# Altium PCB BatteryMonitorPCB.PcbDoc
Units mil, origin at the board's own origin, x right, y up, seen from the top; angles counter-clockwise.
Board outline 6000 x 4000 mil, 2 copper layers (Top Layer, Bottom Layer); 9 components, 7 nets, 28 pads, 0 vias.
Unrouted connection lines stored in the file: 19.
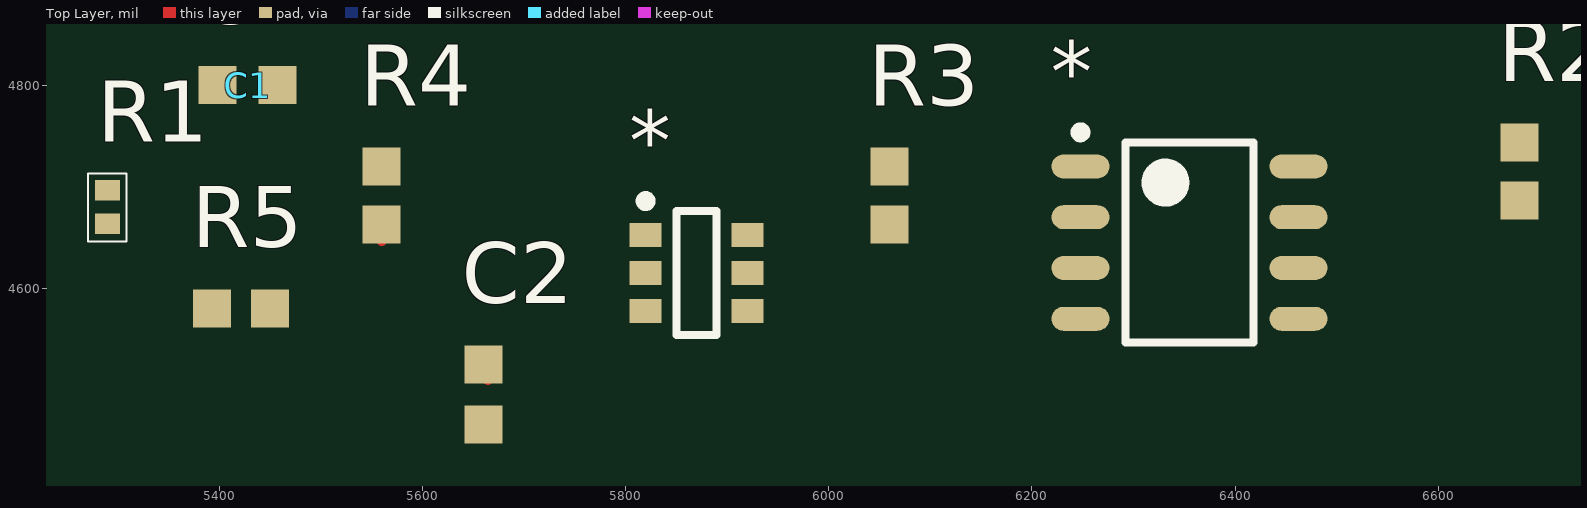
[diagram p0: Top Layer view]
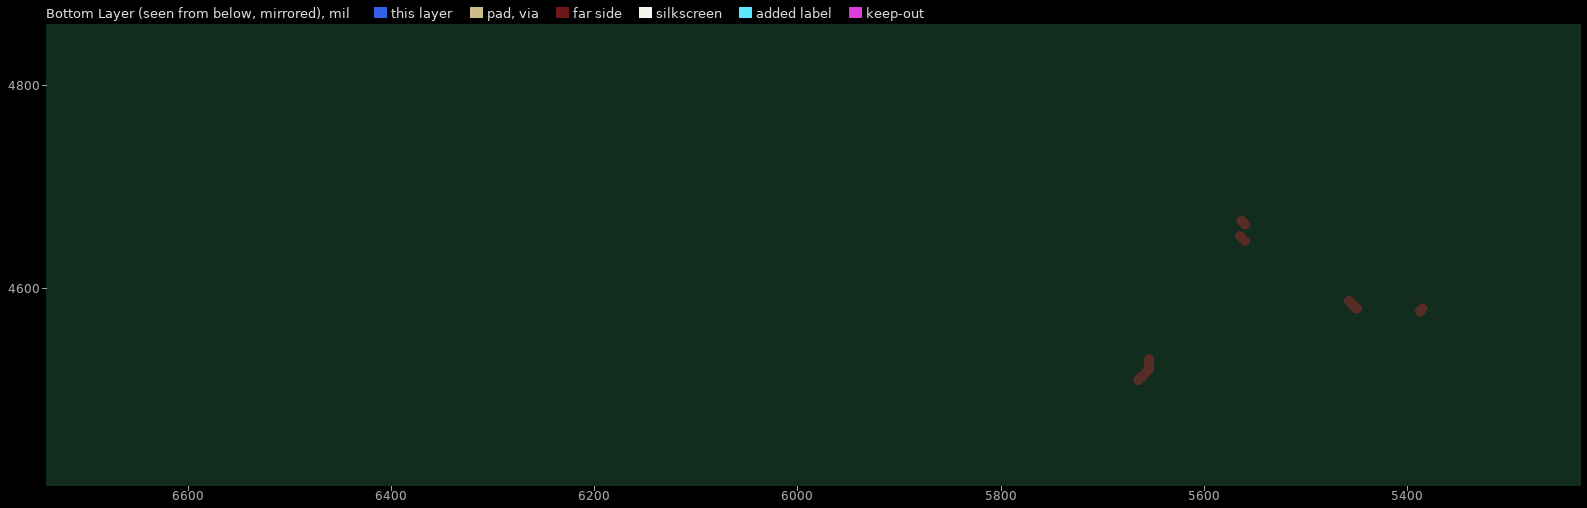
[diagram p1: Bottom Layer view, seen from below]

## Layer stack, top to bottom
Top Solder: solder mask 0.4, Solder Resist, Dk 3.5
Top Layer: signal copper 1.4
Dielectric 1: dielectric 12.6, FR-4, Dk 4.8
Bottom Layer: signal copper 1.4
Bottom Solder: solder mask 0.4, Solder Resist, Dk 3.5

## Board outline
1000,1000 7000,1000 7000,5000 1000,5000

## Design rules (kind name [scope] priority, off if disabled: settings)
Clearance [All] p1: gap=10 ignorepadtopadclearanceinfootprint=FALSE except(0: Arc-Hole Track-Hole SMDPad-Hole THPad-Hole Via-Hole Fill-Hole Poly-Hole Region-Hole Text-Hole)
PolygonConnect [All] p1: connectstyle=Relief reliefconductorwidth=10 reliefentries=4 polygonreliefangle="90 Angle" airgapwidth=10
RoutingVias [All] p1: holewidth=28 width=50 viastyle="Through Hole" minholewidth=28 minwidth=50 maxholewidth=28 maxwidth=50
SolderMaskExpansion [All] p1: expansion=4
Width [All] p1: maxlimit=10 minlimit=10 preferedwidth=10
30 further rules are at their usual default settings.

## Classes and differential pairs
component class BatteryMonitorSchematic: * C1 C2 R1 R2 R3 R4 R5

## Components (designator, comment, footprint, x,y, rotation, side; value= is the part's Value field where it differs from the comment)
* "ISO1540DR" ISO154x 6355,4645 r0 top
* "ADS1000A0IDBVT" ADS1110 5870,4615 r0 top
C1 "0.1uF" CAPC1608X97X38NL12T08 5428.07,4800 r0 top
C2 "0.1uF" CAPC1608X97X38NL12T08 5660,4495.47 r90 top
R1 "10K" 0402 5290,4680 r270 top
R2 "1K" RESC1609X55X30NL10T20 6680,4715 r90 top
R3 "1K" RESC1609X55X30NL10T20 6060,4691.46 r90 top
R4 "1K" RESC1609X55X30NL10T20 5560,4691.46 r90 top
R5 "1K" RESC1609X55X30NL10T20 5421.46,4580 r0 top

## Footprints (in the part's own frame and the unit in brackets; to place one, negate y for a bottom-side part, rotate by r counter-clockwise, add the part's x,y. Pads: shape width x height; smd on the part's side, far side on the other; paste and mask are expansions set on the pad)
0402 [mm]
  rect 0.508x0.63 smd: 1(-0.42,0) 2(0.42,0)
  silkscreen extent -0.84,-0.48 0.86,0.48, body extent -0.5,-0.28 0.5,0.28, height 0.51
ADS1110 [mm] "SOT23, 6-Leads, Body 2.90x2.45mm, Pitch 0.95mm, IPC Medium Density"
  rect 0.8x0.6 smd: 1(-1.275,0.95) 2(-1.275,0) 3(-1.275,-0.95) 4(1.275,-0.95) 5(1.275,0) 6(1.275,0.95)
  silkscreen extent -1.4,-1.55 0.5,1.92, body extent -1.2,-1.53 1.2,1.53, height 1.45
CAPC1608X97X38NL12T08 [mm]
  rect 0.95x0.95 smd: 1(-0.75,0) 2(0.75,0)
  body extent -0.86,-0.46 0.86,0.46, height 0.97
ISO154x [mm] "SOIC, 8-Leads, Body 4.91x3.90mm, Pitch 1.27mm, IPC Medium Density"
  oval 1.45x0.6 smd: 1(-2.725,1.905) 2(-2.725,0.635) 3(-2.725,-0.635) 4(-2.725,-1.905) 5(2.725,-1.905) 6(2.725,-0.635) 7(2.725,0.635) 8(2.725,1.905)
  silkscreen extent -2.85,-2.5 1.6,2.88, body extent -2.61,-2.5 2.61,2.5, height 1.9
RESC1609X55X30NL10T20 [mm]
  rect 0.95x0.95 smd: 1(-0.725,0) 2(0.725,0)
  body extent -0.85,-0.48 0.85,0.48, height 0.55

## Part data
*: "TEXAS INSTRUMENTS - ISO1540DR - DIGITAL ISOLATOR, 2-CH, 1MBPS, SOIC-8", Case/Package=SOIC, Isolated Power=No, Manufacturer="Texas Instruments", Max Operating Temperature=125°C, Max Supply Voltage=5.5V, Min Operating Temperature=-40°C, Min Supply Voltage=3V, Nominal Supply Current=3.6mA, Package Quantity=1, Supplier Part Number 1=296-34871-1-ND, Working Voltage=566V, Category="Interface ICs", Channel Type=Bidirectional, ComponentLink1Description=https://datasheet.ciiva.com/6579/iso1540-6579725.pdf?src-supplier=Digi-Key, ComponentLink1URL=https://datasheet.ciiva.com/6579/iso1540-6579725.pdf?src-supplier=Digi-Key, ComponentLink2Description=https://datasheet.ciiva.com/6579/iso1540-6579723.pdf?src-supplier=Digi-Key, ComponentLink2URL=https://datasheet.ciiva.com/6579/iso1540-6579723.pdf?src-supplier=Digi-Key, ComponentLink3Description=https://datasheet.ciiva.com/6579/iso1540-6579724.pdf?src-supplier=Digi-Key, ComponentLink3URL=https://datasheet.ciiva.com/6579/iso1540-6579724.pdf?src-supplier=Digi-Key, ComponentLink4Description=https://datasheet.ciiva.com/14196/iso1540-14196749.pdf?src-supplier=Avnet, ComponentLink4URL=https://datasheet.ciiva.com/14196/iso1540-14196749.pdf?src-supplier=Avnet, Data Rate=1Mbps, Lead Free="Lead Free", Manufacturer Part Number=ISO1540DR, Mount="Surface Mount", Number of Channels=2, Number of Pins=8, Packaging="Tape and Reel", Pricing 1="1=4.78000, 10=4.28900, 25=4.05440, 100=3.33370, 250=2.99132, 500=2.88320, 1000=2.39666 (USD)", Propagation Delay=70ns, Pulse Width Distortion (PWD)=21ns, REACH SVHC="No SVHC", RoHS=Yes, RoHS Compliant=Yes, Series=-, Stock 1=3199, Supplier 1=Digi-Key, Supply Current=3.6mA
*: "IC ADC 12BIT I2C INTRFC SOT23-6", Case/Package=SOT-23, Manufacturer="Texas Instruments", Max Operating Temperature=125°C, Max Power Dissipation=750uW, Max Supply Voltage=5.5V, Min Operating Temperature=-40°C, Min Supply Voltage=2.7V, Nominal Supply Current=90uA, Operating Supply Voltage=5V, Package Quantity=250, ADS1000A0IDBVT=296-20737-1-ND, Category="Analog to Digital Converters (ADCs)", ComponentLink1Description=https://datasheet.ciiva.com/34304/2045835-34304018.pdf?src-supplier=Jameco, ComponentLink1URL=https://datasheet.ciiva.com/34304/2045835-34304018.pdf?src-supplier=Jameco, ComponentLink2Description=https://datasheet.ciiva.com/3038/sbas357a-3038709.pdf?src-supplier=Avnet, ComponentLink2URL=https://datasheet.ciiva.com/3038/sbas357a-3038709.pdf?src-supplier=Avnet, ComponentLink3Description=https://datasheet.ciiva.com/1704/1831216-1704227.pdf?src-supplier=Element14, ComponentLink3URL=https://datasheet.ciiva.com/1704/1831216-1704227.pdf?src-supplier=Element14, ComponentLink4Description=https://datasheet.ciiva.com/3037/sbas357a-3037894.pdf?src-supplier=Avnet, ComponentLink4URL=https://datasheet.ciiva.com/3037/sbas357a-3037894.pdf?src-supplier=Avnet, ComponentLink5Description=https://datasheet.ciiva.com/7989/ads1000-7989305.pdf?src-supplier=Element14, ComponentLink5URL=https://datasheet.ciiva.com/7989/ads1000-7989305.pdf?src-supplier=Element14, ComponentLink6Description=https://datasheet.ciiva.com/15148/getdatasheetpartid-184680-15148061.pdf?src-supplier=Verical, ComponentLink6URL=https://datasheet.ciiva.com/15148/getdatasheetpartid-184680-15148061.pdf?src-supplier=Verical, ComponentLink7Description=https://datasheet.ciiva.com/1275/ads1000-1275150.pdf?src-supplier=Digi-Key, ComponentLink7URL=https://datasheet.ciiva.com/1275/ads1000-1275150.pdf?src-supplier=Digi-Key, ComponentLink8Description=https://datasheet.ciiva.com/1275/ads1000-1275151.pdf?src-supplier=Digi-Key, ComponentLink8URL=https://datasheet.ciiva.com/1275/ads1000-1275151.pdf?src-supplier=Digi-Key, Contact Plating=Gold, Conversion Rate=128S/s, Differential Nonlinearity=1LSB, Height=1.15mm, Integral Nonlinearity (INL)=1LSB, Interface=I2C, Lead Free="Lead Free", Length=2.9mm, Manufacturer Part Number=ADS1000A0IDBVT, Mount="Surface Mount", Number of A/D Converters=1, Number of Analog Inputs=1, Number of Bits=12, Number of Channels=1, Number of Converters=1, Number of Elements=1, Number of Inputs=1, Number of Pins=6, Packaging="Tape and Reel", Polarity=Bipolar, Power Dissipation=750uW, Pricing 1="1=2.88000, 10=2.58400, 25=2.43800, 100=1.95040 (USD)", Radiation Hardening=No, REACH SVHC="No SVHC", Resolution=12b, RoHS=Yes, RoHS Compliant=Yes, Sampling Rate=128S/s, Stock 1=586, Supplier 1=Digi-Key, Supply Type=Single, Termination=SMD/SMT, Width=1.6mm
C1 C2: library part VJ0603Y104KXXAC, "CAP CER 0.1UF 25V X7R 0603", Manufacturer=Vitramon, Part Number=VJ0603Y-104KXXAC, Supplier Part Number 1=720-1378-1-ND, Supplier 1=Digi-Key
R1: library part CRCW040210K0FKEDC, "RES SMD 10K OHM 1% 1/16W 0402", Capacitance=10uF, Case/Package=0603, Case Code (Metric)=1608, Dielectric=X5R, Dielectric Material=Ceramic, Max Operating Temperature=85°C, Min Operating Temperature=-55°C, Package Quantity=1, Supplier Part Number 1=541-3959-1-ND, Tolerance=20%, Voltage Rating=25V, Case Code (Imperial)=0603, ComponentLink1Description=http://components.arrow.com/part/dataview/0323_06887183?src-supplier=Arrow+Europe, ComponentLink1URL=http://components.arrow.com/part/dataview/0323_06887183?src-supplier=Arrow+Europe, ComponentLink2Description=http://www.farnell.com/datasheets/2792994.pdf?src-supplier=Farnell, ComponentLink2URL=http://www.farnell.com/datasheets/2792994.pdf?src-supplier=Farnell, ComponentLink3Description=http://www.farnell.com/datasheets/2291921.pdf?src-supplier=Avnet, ComponentLink3URL=http://www.farnell.com/datasheets/2291921.pdf?src-supplier=Avnet, ComponentLink4Description=http://www.farnell.com/datasheets/2792994.pdf?src-supplier=Newark, ComponentLink4URL=http://www.farnell.com/datasheets/2792994.pdf?src-supplier=Newark, ComponentLink5Description=http://www.farnell.com/datasheets/2291921.pdf?src-supplier=Newark, ComponentLink5URL=http://www.farnell.com/datasheets/2291921.pdf?src-supplier=Newark, ComponentLink6Description=http://www.farnell.com/datasheets/2792994.pdf?src-supplier=Element14, ComponentLink6URL=http://www.farnell.com/datasheets/2792994.pdf?src-supplier=Element14, ComponentLink7Description=http://www.farnell.com/datasheets/1913358.pdf?src-supplier=Element14, ComponentLink7URL=http://www.farnell.com/datasheets/1913358.pdf?src-supplier=Element14, ComponentLink8Description=https://product.tdk.com/info/en/catalog/datasheets/mlcc_commercial_general_en.pdf?src-supplier=Digi-Key, ComponentLink8URL=https://product.tdk.com/info/en/catalog/datasheets/mlcc_commercial_general_en.pdf?src-supplier=Digi-Key, ComponentLink9Description=http://www.farnell.com/datasheets/2291921.pdf?src-supplier=RSComponents, ComponentLink9URL=http://www.farnell.com/datasheets/2291921.pdf?src-supplier=RSComponents, ComponentLink10Description=http://www.farnell.com/datasheets/2291921.pdf?src-supplier=Verical, ComponentLink10URL=http://www.farnell.com/datasheets/2291921.pdf?src-supplier=Verical, ComponentLink11Description=http://www.farnell.com/datasheets/2291921.pdf?src-supplier=Mouser, ComponentLink11URL=http://www.farnell.com/datasheets/2291921.pdf?src-supplier=Mouser, ComponentLink12Description=http://www.farnell.com/datasheets/2291921.pdf?src-supplier=Quest, ComponentLink12URL=http://www.farnell.com/datasheets/2291921.pdf?src-supplier=Quest, ComponentLink13Description=http://www.farnell.com/datasheets/2291921.pdf?src-supplier=TTI, ComponentLink13URL=http://www.farnell.com/datasheets/2291921.pdf?src-supplier=TTI, Composition=Ceramic, Depth=0.8mm, Height=0.8mm, Lead Free="Lead Free", Length=1.6mm, Mount="Surface Mount", Packaging="Tape and Reel", REACH SVHC="No SVHC", RoHS=Yes, Supplier 1=Digi-Key, Termination=SMD/SMT, Thickness=0.039inch, Voltage Rating (DC)=25V, Weight=7.1E-05oz, Width=0.8mm
R2 R3 R4 R5: library part TNPW06031K00BEEA, "RES 1K OHM 0.1% 1/8W 0603", Case/Package=0603, Case Code (Metric)=1608, Max Operating Temperature=125°C, Max Power Dissipation=100mW, Min Operating Temperature=-55°C, Package Quantity=1, Resistance=1kR, Supplier Part Number 1=TNP1.00KAACT-ND, Temperature Coefficient=25ppm/°C, Tolerance=1%, Voltage Rating=75V, Case Code (Imperial)=0603, ComponentLink1Description=https://datasheet.ciiva.com/2528/tnpw-e3-2528472.pdf?src-supplier=Digi-Key, ComponentLink1URL=https://datasheet.ciiva.com/2528/tnpw-e3-2528472.pdf?src-supplier=Digi-Key, ComponentLink2Description=https://datasheet.ciiva.com/2528/tnpw-e3-2528473.pdf?src-supplier=Digi-Key, ComponentLink2URL=https://datasheet.ciiva.com/2528/tnpw-e3-2528473.pdf?src-supplier=Digi-Key, ComponentLink3Description=https://datasheet.ciiva.com/9112/tnpw-e3-9112138.pdf?src-supplier=Avnet, ComponentLink3URL=https://datasheet.ciiva.com/9112/tnpw-e3-9112138.pdf?src-supplier=Avnet, ComponentLink4Description=https://datasheet.ciiva.com/16391/tnpw-e3-16391675.pdf?src-supplier=Future+Electronics, ComponentLink4URL=https://datasheet.ciiva.com/16391/tnpw-e3-16391675.pdf?src-supplier=Future+Electronics, ComponentLink5Description=https://datasheet.ciiva.com/9112/tnpw-e3-9112141.pdf?src-supplier=Avnet, ComponentLink5URL=https://datasheet.ciiva.com/9112/tnpw-e3-9112141.pdf?src-supplier=Avnet, ComponentLink6Description=https://datasheet.ciiva.com/16782/70201627-16782047.pdf?src-supplier=Allied+Electronics, ComponentLink6URL=https://datasheet.ciiva.com/16782/70201627-16782047.pdf?src-supplier=Allied+Electronics, Composition="Thin Film", Contact Plating=Tin, Depth=0.85mm, Features="Moisture Resistant,Automotive AEC-Q200,Anti-Sulfur", Height=0.45mm, Lead Free="Lead Free", Length=1.6mm, Military Standard=Not, Mount="Surface Mount", Number of Terminations=2, Packaging="Tape and Reel", Power Rating=100mW, Radiation Hardening=No, REACH SVHC=Unknown, RoHS=Yes, Supplier 1=Digi-Key, Termination=SMD/SMT, Voltage Rating (DC)=75V, Weight=7.1E-05oz, Width=0.033inch

## Nets (pads, with @x,y where several pads share a name; then routed paths per layer and width w, separated by ;. In a path a pad name is that pad's centre, name@x,y a point inside that pad or via, vN(x,y) a via of type N, cw(c..) or ccw(c..) an arc to the next point about the centre after c; other vN are vias at no path point)
3.3V: *.1@6247.72,4720 *.2@5819.8,4615 *.8 C1.1 R2.2 R3.2 R4.2
16.8V: R1.1
GND: *.1@5819.8,4652.4 *.3@6247.72,4620 *.4 *.5 C2.1
Net*_2: *.2@6247.72,4670 *.6@5920.2,4652.4 R2.1
Net*_3: *.3@5819.8,4577.6 C2.2 R4.1 R5.2 | length 47.4
  Top Layer w10: R5.2 R5.2@5457.6,4587.6 ; R4.1@5560,4646.46 R4.1@5565,4651.46 ; R4.1 R4.1@5563.54,4666.46 ; C2.2@5654.53,4530.47 5654.53,4520 C2.2@5664.53,4510
Net*_6: *.6@6462.28,4620 R3.1
NetR1_2: R1.2 R5.1 | length 3.7
  Top Layer w10: R5.1@5385.31,4580 R5.1@5387.91,4577.4
pads on no net: *.7 C1.2